# Altium PCB debug_interface.PcbDoc
Units mil, origin at the board's own origin, x right, y up, seen from the top; angles counter-clockwise.
Board outline 745 x 445 mil, 2 copper layers (Top Layer, Bottom Layer); 2 components, 0 nets, 11 pads, 0 vias.
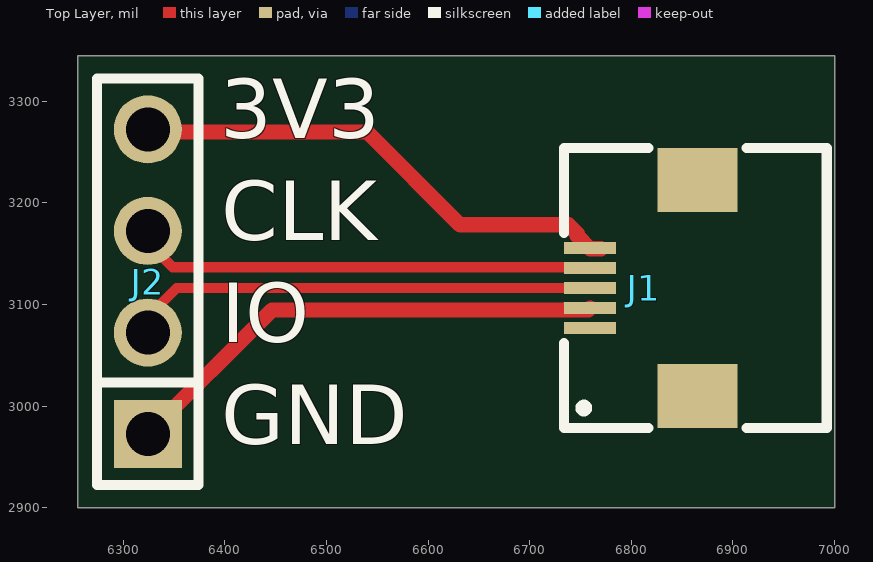
[diagram p0: Top Layer view]
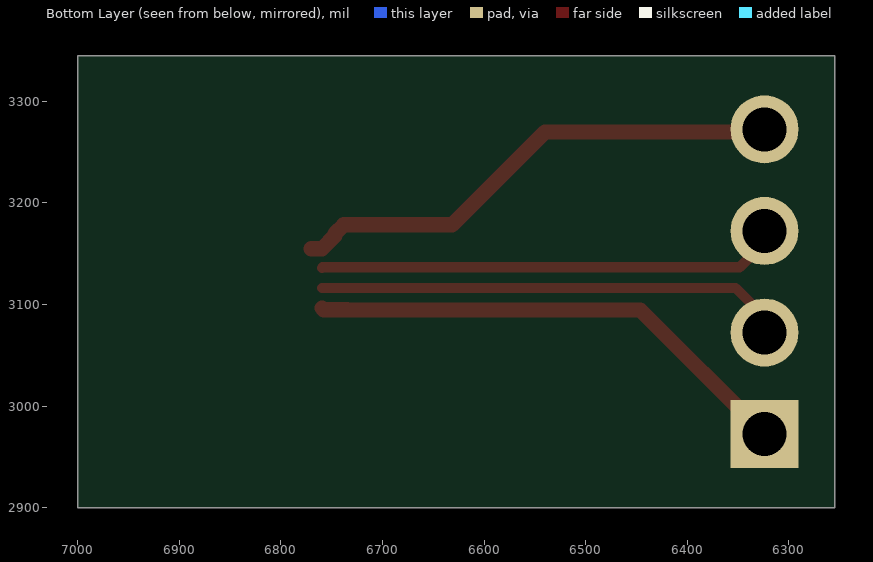
[diagram p1: Bottom Layer view, seen from below]

## Layer stack, top to bottom
Top Solder: solder mask 0.4, Solder Resist, Dk 3.5
Top Layer: signal copper 1.4
Dielectric 1: dielectric 12.6, FR-4, Dk 4.8
Bottom Layer: signal copper 1.4
Bottom Solder: solder mask 0.4, Solder Resist, Dk 3.5

## Board outline
6255,3021.25 6255,3345 7000,3345 7000,2900 6255,2900

## Design rules (kind name [scope] priority, off if disabled: settings)
Clearance [All] p1: gap=10 ignorepadtopadclearanceinfootprint=FALSE except(0: Arc-Hole Track-Hole SMDPad-Hole THPad-Hole Via-Hole Fill-Hole Poly-Hole Region-Hole Text-Hole)
PolygonConnect [All] p1: connectstyle=Relief reliefconductorwidth=10 reliefentries=4 polygonreliefangle="90 Angle" airgapwidth=10
RoutingVias [All] p1: holewidth=28 width=50 viastyle="Through Hole" minholewidth=28 minwidth=50 maxholewidth=28 maxwidth=50
SolderMaskExpansion [All] p1: expansion=4 istentingtop=FALSE
Width [All] p1: maxlimit=10 minlimit=10 preferedwidth=10
30 further rules are at their usual default settings.

## Components (designator, comment, footprint, x,y, rotation, side; value= is the part's Value field where it differs from the comment)
J1 "Comment" FPC-SMD_AFC01-S05FCA-00 6812.24,3116.3 r90 top
J2 "Comment" HDR-TH_4P-P2.54-V-M 6323.97,3122.48 r90 top

## Footprints (in the part's own frame and the unit in brackets; to place one, negate y for a bottom-side part, rotate by r counter-clockwise, add the part's x,y. Pads: shape width x height; smd on the part's side, far side on the other; paste and mask are expansions set on the pad)
FPC-SMD_AFC01-S05FCA-00 [mm]
  rect 0.3x1.3 smd: 1(-1,1.34) 2(-0.5,1.34) 3(0,1.34) 4(0.5,1.34) 5(1,1.34)
  rect 1.6x2 smd: 6(2.7,-1.34) 7(-2.7,-1.34)
  silkscreen extent -3.5,-4.57 3.5,2
HDR-TH_4P-P2.54-V-M [mm]
  rect 1.7x1.7 hole 1.1 paste+0 mask+0.051: 1(-3.81,0)
  round 1.7 hole 1.1 paste+0 mask+0.051: 2(-1.27,0) 3(1.27,0) 4(3.81,0)
  silkscreen extent -5.08,-1.27 5.08,1.27

## Nets (pads, with @x,y where several pads share a name; then routed paths per layer and width w, separated by ;. In a path a pad name is that pad's centre, name@x,y a point inside that pad or via, vN(x,y) a via of type N, cw(c..) or ccw(c..) an arc to the next point about the centre after c; other vN are vias at no path point)
pads on no net: J1.1 J1.2 J1.3 J1.4 J1.5 J1.6 J1.7 J2.1 J2.2 J2.3 J2.4
copper on no net: | length 1928.8
  Top Layer w10: 6313.32,3170 6315.23,3170 6348.49,3136.74 6758.74,3136.74 6759.49,3135.99 ; 6323.97,3072.48 6323.97,3087.89 6352.43,3116.34 6759.45,3116.34 6759.49,3116.3
  Top Layer w15: 6300,3270 6540,3270 6631.48,3178.52 6738.12,3178.52 6746.64,3170 6746.64,3167.87 6759.52,3155 6770,3155 ; 6323.97,2972.48 6446.25,3094.75 6734.48,3094.75 6734.75,3095.03 6757.9,3095.03 6759.49,3096.62

## Silkscreen, mask and mechanical layers (free items; w line width, h text height)
Top Overlay:
  text "3V3" at 6395.13,3244.38 h100
  text "CLK" at 6396.24,3143.96 h100
  text "IO" at 6396.31,3043.54 h100
  text "GND" at 6396.24,2943.11 h100
Mechanical 1:
  lines w10: 6255,2900 6255,3021.25 6255,3223.75 6255,3345 7000,3345 7000,2900 6255,2900